# Altium PCB Analog_readout.PcbDoc
Units mm, origin at the board's own origin, x right, y up, seen from the top; angles counter-clockwise.
Board outline 100.46 x 91.44 mm, 2 copper layers (Top Layer, Bottom Layer); 87 components, 48 nets, 223 pads, 13 vias.
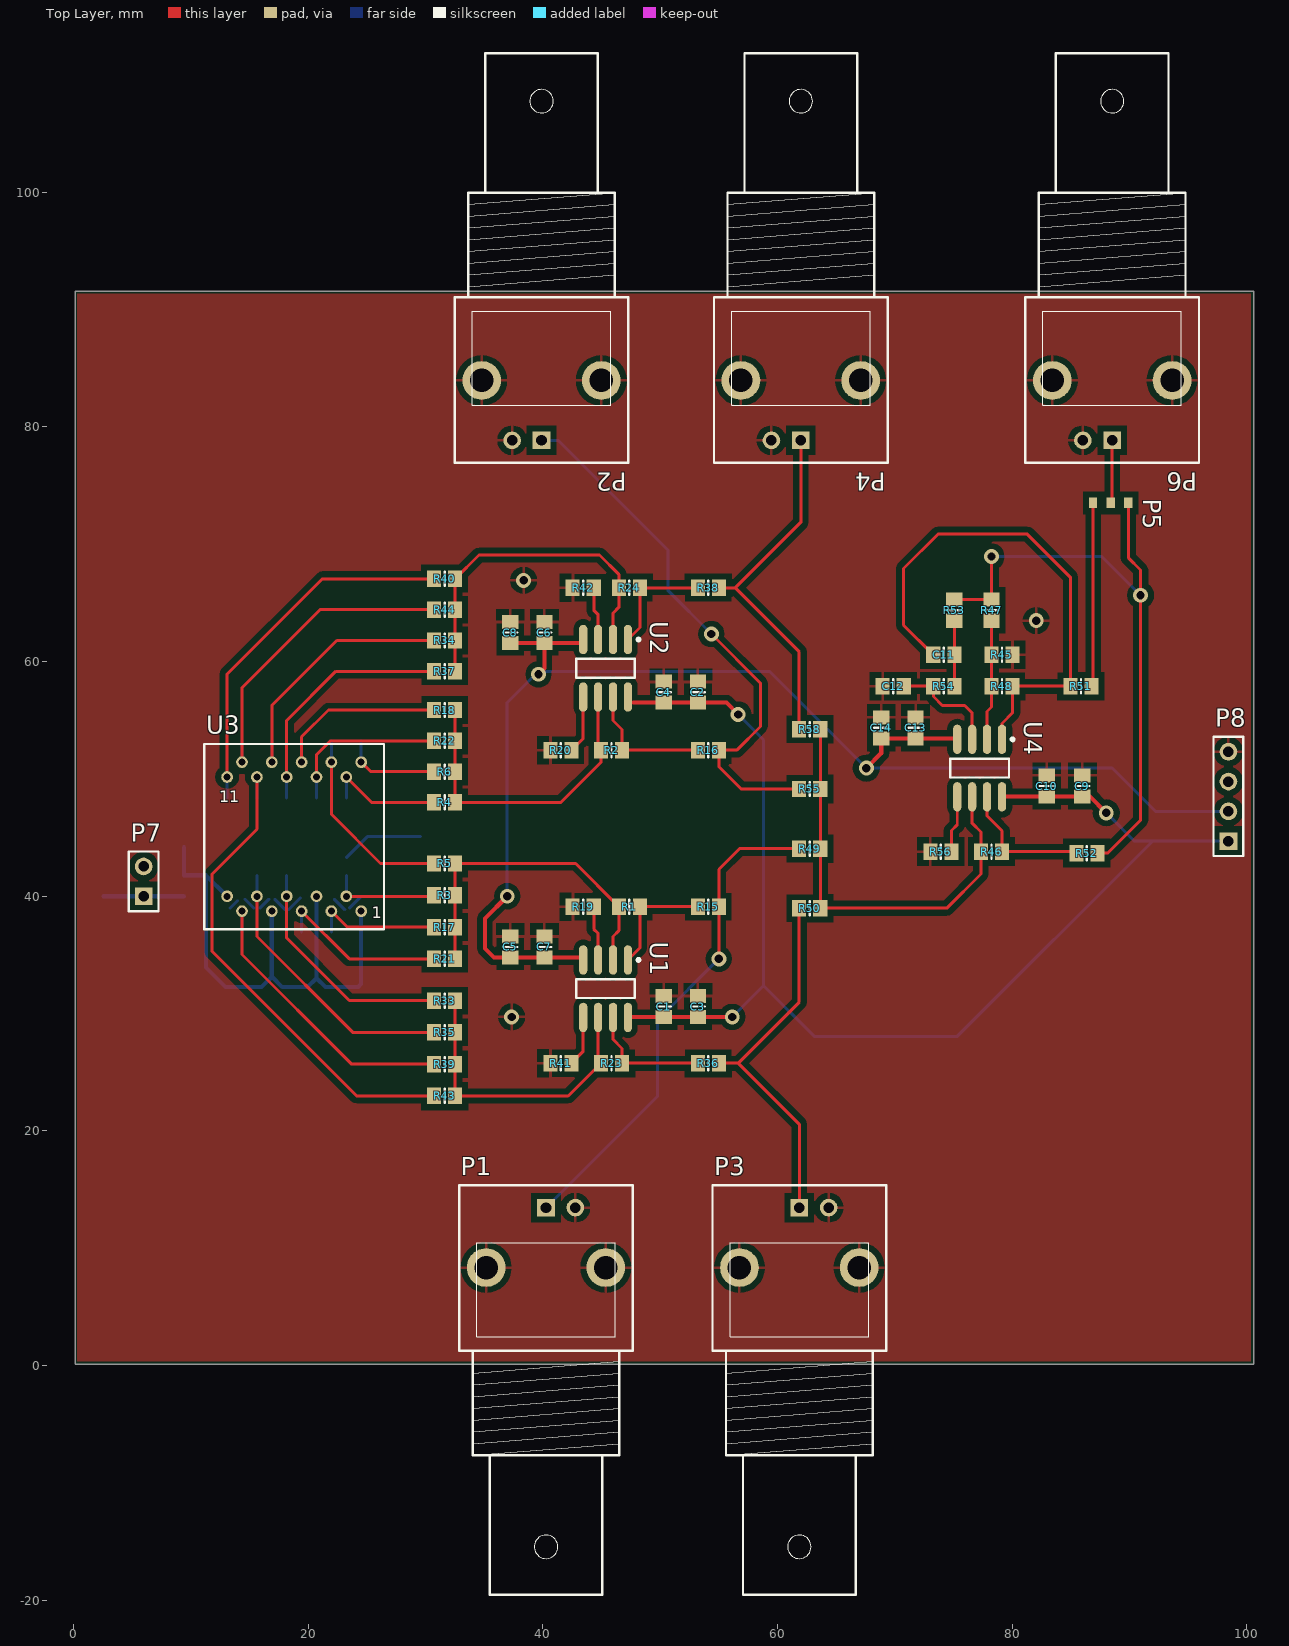
[diagram p0: Top Layer view]
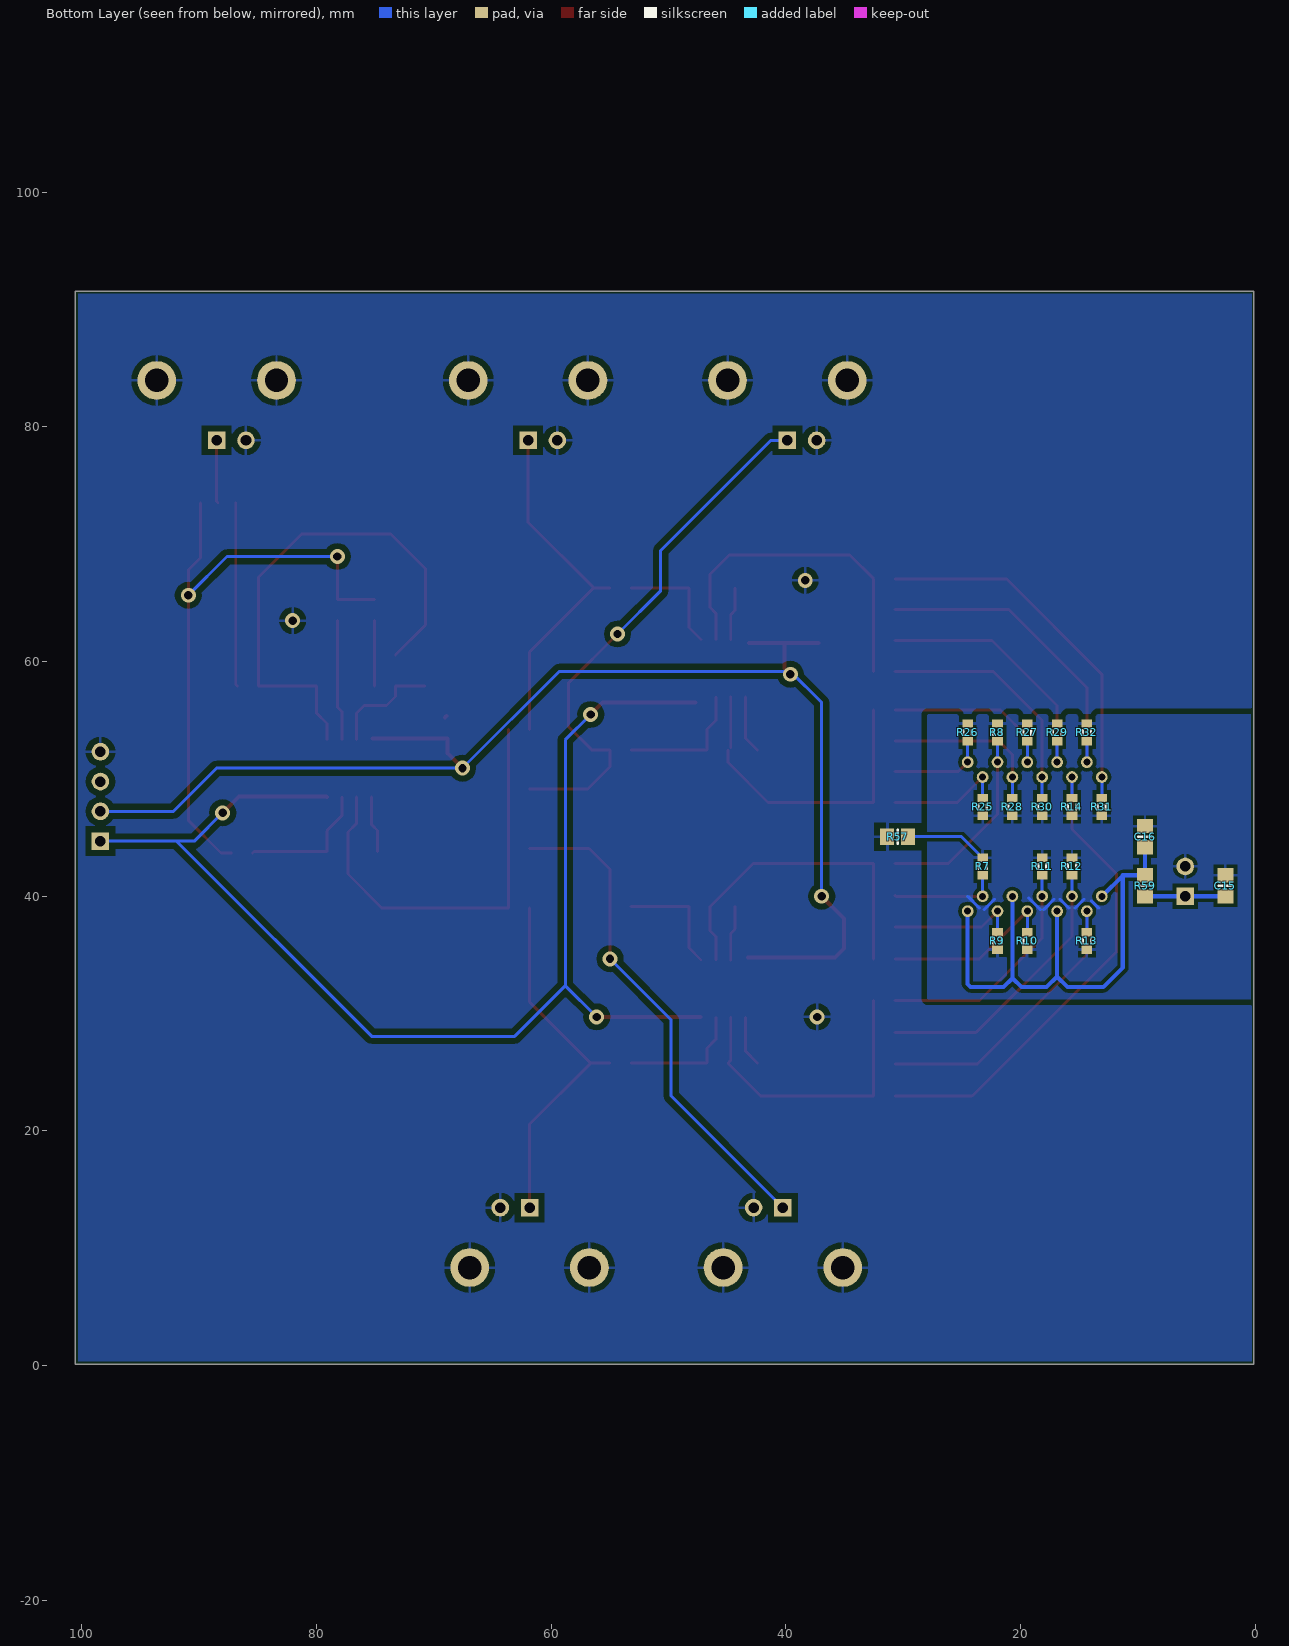
[diagram p1: Bottom Layer view, seen from below]

## Layer stack, top to bottom
Top Layer: signal copper 0.0356
Dielectric: dielectric 0.32, FR-4, Dk 4.8
Bottom Layer: signal copper 0.0356

## Board outline
0.127,0.127 0.127,91.567 100.584,91.567 100.584,0.127

## Design rules (kind name [scope] priority, off if disabled: settings)
Clearance Clearance_4 [InNamedPolygon('gnd_29') vs InNamedPolygon('gnd_bot')] p1: gap=0.5
Clearance Clearance_3 [InNamedPolygon('gnd_29')] p2: gap=0.3
Clearance Clearance_2 [InNamedPolygon('gnd_top')] p3: gap=0.5
Clearance Clearance_1 [InNamedPolygon('gnd_bot')] p4: gap=0.5
Clearance [All] p5: gap=0.254
HoleToHoleClearance [All] p1: gap=0.127 allowstackedmicrovias=TRUE
MinimumSolderMaskSliver MinimumSolderMaskSliver_1 [(InComponent('U3') OR InComponentClass('Bottom Side Components'))] p1: minsoldermaskwidth=0.05
MinimumSolderMaskSliver [All] p2: minsoldermaskwidth=0.254
PolygonConnect [All] p1: connectstyle=Relief reliefconductorwidth=0.254 reliefentries=4 polygonreliefangle="90 Angle"
RoutingVias [All] p1: holewidth=0.711 width=1.27 viastyle="Through Hole" minholewidth=0.711 minwidth=1.27 maxholewidth=0.711 maxwidth=1.27
SilkscreenOverComponentPads [All] p1: minsilkscreentomaskgap=0.254
SolderMaskExpansion SolderMaskExpansion_1 [(InComponent('U3') OR InComponentClass('Bottom Side Components'))] p1: expansion=0.05
SolderMaskExpansion [All] p2: expansion=0.102
Width Width_1 [(InNet('+29V') OR InNet('-5') OR InNet('+5') OR InNet('29_GND') OR InNet('GND')OR InNet('+29'))] p1: maxlimit=0.35 minlimit=0.254 preferedwidth=0.35 toplayer_minwidth=0.35 minimp=50.000000 maximp=50.000000 favimp=50.000000
Width [All] p2: maxlimit=0.254 minlimit=0.254 preferedwidth=0.254
25 further rules are at their usual default settings.

## Components (designator, comment, footprint, x,y, rotation, side; value= is the part's Value field where it differs from the comment)
C1 "Cap" 6-0805_N 50.292,30.607 r270 top
C2 "Cap" 6-0805_N 53.213,57.404 r270 top
C3 "Cap Pol3" 6-0805_N 53.213,30.607 r90 top
C4 "Cap Pol3" 6-0805_N 50.292,57.404 r90 top
C5 "Cap" 6-0805_N 37.211,35.687 r270 top
C6 "Cap" 6-0805_N 40.132,62.484 r270 top
C7 "Cap Pol3" 6-0805_N 40.132,35.687 r270 top
C8 "Cap Pol3" 6-0805_N 37.211,62.484 r270 top
C9 "Cap" 6-0805_N 85.979,49.403 r270 top
C10 "Cap Pol3" 6-0805_N 82.931,49.403 r90 top
C11 "Cap" 6-0805_N 74.168,60.579 r180 top
C12 "Cap" 6-0805_N 69.85,57.912 r180 top
C13 "Cap" 6-0805_N 71.755,54.356 r270 top
C14 "Cap Pol3" 6-0805_N 68.834,54.356 r270 top
C15 "Cap" 6-0805_N 2.54,40.894 r270 bottom
C16 "Cap" 6-0805_N 9.398,45.085 r270 bottom
P1 "BNC" "BNC_RA CON" 40.259,13.462 r90 top
P2 "BNC" "BNC_RA CON" 39.878,78.867 r270 top
P3 "BNC" "BNC_RA CON" 61.849,13.462 r90 top
P4 "BNC" "BNC_RA CON" 61.976,78.867 r270 top
P5 "SwitchSMD_3" SwitchSMD_0603 88.392,73.533 r0 top
P6 "BNC" "BNC_RA CON" 88.519,78.867 r270 top
P7 "Header 2" HDR1X2 5.969,40.005 r90 top
P8 "Header 4" HDR1X4 98.425,44.704 r90 top
R1 "Res3" 6-0805_N 47.371,39.116 r0 top
R2 "Res3" 6-0805_N 45.847,52.451 r0 top
R3 "Res3" 6-0805_N 31.623,40.09 r0 top
R4 "Res3" 6-0805_N 31.623,48.006 r0 top
R5 "Res3" 6-0805_N 31.623,42.799 r0 top
R6 "Res3" 6-0805_N 31.623,50.631 r0 top
R7 "Res3" J1-0603 23.241,42.545 r270 bottom
R8 "Res3" J1-0603 21.971,53.975 r270 bottom
R9 "Res3" J1-0603 21.971,36.195 r90 bottom
R10 "Res3" J1-0603 19.431,36.195 r90 bottom
R11 "Res3" J1-0603 18.161,42.545 r270 bottom
R12 "Res3" J1-0603 15.621,42.545 r270 bottom
R13 "Res3" J1-0603 14.351,36.195 r90 bottom
R14 "Res3" J1-0603 15.621,47.625 r90 bottom
R15 "Res3" 6-0805_N 54.102,39.116 r0 top
R16 "Res3" 6-0805_N 54.102,52.451 r0 top
R17 "Res3" 6-0805_N 31.623,37.38 r0 top
R18 "Res3" 6-0805_N 31.623,55.88 r0 top
R19 "Res3" 6-0805_N 43.434,39.116 r0 top
R20 "Res3" 6-0805_N 41.529,52.451 r0 top
R21 "Res3" 6-0805_N 31.623,34.671 r0 top
R22 "Res3" 6-0805_N 31.623,53.255 r0 top
R23 "Res3" 6-0805_N 45.847,25.781 r0 top
R24 "Res3" 6-0805_N 47.371,66.294 r0 top
R25 "Res3" J1-0603 23.241,47.625 r90 bottom
R26 "Res3" J1-0603 24.511,53.975 r270 bottom
R27 "Res3" J1-0603 19.431,53.975 r270 bottom
R28 "Res3" J1-0603 20.701,47.625 r90 bottom
R29 "Res3" J1-0603 16.891,53.975 r270 bottom
R30 "Res3" J1-0603 18.161,47.625 r90 bottom
R31 "Res3" J1-0603 13.081,47.625 r90 bottom
R32 "Res3" J1-0603 14.351,53.975 r270 bottom
R33 "Res3" 6-0805_N 31.623,31.115 r0 top
R34 "Res3" 6-0805_N 31.623,61.807 r0 top
R35 "Res3" 6-0805_N 31.623,28.406 r0 top
R36 "Res3" 6-0805_N 54.102,25.781 r0 top
R37 "Res3" 6-0805_N 31.623,59.182 r0 top
R38 "Res3" 6-0805_N 54.102,66.294 r0 top
R39 "Res3" 6-0805_N 31.623,25.696 r0 top
R40 "Res3" 6-0805_N 31.623,67.056 r0 top
R41 "Res3" 6-0805_N 41.529,25.781 r0 top
R42 "Res3" 6-0805_N 43.434,66.294 r0 top
R43 "Res3" 6-0805_N 31.623,22.987 r0 top
R44 "Res3" 6-0805_N 31.623,64.431 r0 top
R45 "Res3" 6-0805_N 79.121,60.579 r0 top
R46 "Res3" 6-0805_N 78.232,43.815 r0 top
R47 "Res3" 6-0805_N 78.232,64.389 r90 top
R48 "Res3" 6-0805_N 79.121,57.912 r180 top
R49 "Res3" 6-0805_N 62.738,44.069 r0 top
R50 "Res3" 6-0805_N 62.738,38.989 r0 top
R51 "Res3" 6-0805_N 85.852,57.912 r0 top
R52 "Res3" 6-0805_N 86.36,43.688 r0 top
R53 "Res3" 6-0805_N 75.057,64.389 r90 top
R54 "Res3" 6-0805_N 74.168,57.912 r0 top
R55 "Res3" 6-0805_N 62.738,49.149 r0 top
R56 "Res3" 6-0805_N 73.914,43.815 r0 top
R57 "Res3" 6-0805_N 30.48,45.085 r180 bottom
R58 "Res3" 6-0805_N 62.738,54.229 r0 top
R59 "Res3" 6-0805_N 9.398,40.894 r270 bottom
U1 "AD8002AR" SO-8_M 45.339,32.131 r270 top
U2 "AD8002AR" SO-8_M 45.339,59.436 r270 top
U3 "SPMArray4_Sensl" Sensl_PGA20P_v2 24.511,38.735 r0 top
U4 "AD8002AR" SO-8_M 77.216,50.927 r270 top

## Footprints (in the part's own frame and the unit in brackets; to place one, negate y for a bottom-side part, rotate by r counter-clockwise, add the part's x,y. Pads: shape width x height; smd on the part's side, far side on the other; paste and mask are expansions set on the pad)
6-0805_N [mm] "Chip Resistor, Body 2.0x1.2mm, IPC Medium Density"
  rect 1.2x1.4 smd: 1(-0.9,0) 2(0.9,0)
  silkscreen extent 0,-0.6 0,0.6, body extent -1.07,-0.7 1.07,0.7, height 0.7
"BNC_RA CON" [mm] "Connector; BNC Elbow"
  rect 1.5x1.5 hole 0.9: 1(0,0)
  round 3.3 hole 2: 2(-5.1,-5.1) 2(-5.1,5.1)
  round 1.5 hole 0.9: 2(0,-2.5)
  silkscreen extent -33,-7.4 1.9,7.4
HDR1X2 [mm] "Connector; Header; 2 Position"
  rect 1.5x1.5 hole 0.9: 1(0,0)
  round 1.5 hole 0.9: 2(2.54,0)
  silkscreen extent -1.27,-1.27 3.81,1.27
HDR1X4 [mm] "Connector; Header; 4 Position"
  rect 1.5x1.5 hole 0.9: 1(0,0)
  round 1.5 hole 0.9: 2(2.54,0) 3(5.08,0) 4(7.62,0)
  silkscreen extent -1.27,-1.27 8.89,1.27
J1-0603 [mm] "Chip Resistor, Body 1.6x0.8mm, IPC High Density"
  rect 0.7x0.9 smd: 1(-0.75,0) 2(0.75,0)
  silkscreen extent -0.2,-0.35 0.2,0.35, body extent -0.85,-0.48 0.85,0.48, height 0.9
Sensl_PGA20P_v2 [mm]
  round 1 hole 0.6: 1(0,0) 2(-1.27,1.27) 3(-2.54,0) 4(-3.81,1.27) 5(-5.08,0) 6(-6.35,1.27) 7(-7.62,0) 8(-8.89,1.27) 9(-10.16,0) 10(-11.43,1.27) 11(-11.43,11.43) 12(-10.16,12.7) 13(-8.89,11.43) 14(-7.62,12.7) 15(-6.35,11.43) 16(-5.08,12.7) 17(-3.81,11.43) 18(-2.54,12.7) 19(-1.27,11.43) 20(0,12.7)
  silkscreen extent -13.37,-1.55 1.94,14.25
SO-8_M [mm] "SOIC, 8-Leads, Body 4.9x3.9mm, Pitch 1.27mm, IPC Low Density"
  oval 2.5x0.7 smd: 1(-2.45,1.905) 2(-2.45,0.635) 3(-2.45,-0.635) 4(-2.45,-1.905) 5(2.45,-1.905) 6(2.45,-0.635) 7(2.45,0.635) 8(2.45,1.905)
  silkscreen extent -2.57,-2.5 0.8,2.93, body extent -2,-2.5 2,2.5, height 1.75
SwitchSMD_0603 [mm] "3 pins 0603"
  rect 0.7x0.9 smd: 1(-1.5,0) 2(1.5,0) 3(0,0)
  body extent -1.6,-0.48 1.6,0.48, height 0.9

## Part data
C1 C2 C5 C6 C9 C11 C12 C13 C15 C16: "Capacitor"
C3 C4 C7 C8 C10 C14: "Polarized Capacitor (Surface Mount)"
P1 P2 P3 P4 P6: "BNC Elbow Connector"
P7: "Header, 2-Pin"
P8: "Header, 4-Pin"
R1 R2 R3 R4 R5 R6 R7 R8 R9 R10 R11 R12 R13 R14 R15 R16 R17 R18 R19 R20 R21 R22 R23 R24 R25 R26 R27 R28 R29 R30 R31 R32 R33 R34 R35 R36 R37 R38 R39 R40 R41 R42 R43 R44 R45 R46 R47 R48 R49 R50 R51 R52 R53 R54 R55 R56 R57 R58 R59: "Resistor"
U1 U2 U4: "Dual 600MHz, 50mW Current Feedback Amplifier"

## Via types
v1: diameter 1.27, hole 0.711, Top Layer to Bottom Layer, 13 vias

## Nets (pads, with @x,y where several pads share a name; then routed paths per layer and width w, separated by ;. In a path a pad name is that pad's centre, name@x,y a point inside that pad or via, vN(x,y) a via of type N, cw(c..) or ccw(c..) an arc to the next point about the centre after c; other vN are vias at no path point)
29_GND: C15.1 C16.1 P7.2 R7.1 R8.1 R9.1 R10.1 R11.1 R12.1 R13.1 R14.1 R25.1 R26.1 R27.1 R28.1 R29.1 R30.1 R31.1 R32.1 R57.2 | length 15.5
  Bottom Layer w0.254: 13.335,38.989 13.97,39.624 ; 14.605,39.751 15.367,38.989 ; 15.875,38.989 16.637,39.751 ; 17.145,39.751 18.034,38.862 ; 18.312,38.862 19.328,39.878 ; 22.225,39.751 23.114,38.862 ; R7.1 25.031,45.085 R57.2 ; 23.495,38.989 24.511,40.005
+5: C1.2 C2.2 C3.1 C4.1 C9.2 C10.1 P8.1 U1.8 U2.8 U4.8 | length 108.9
  Top Layer w0.35: U1.8@47.27,29.707 C1.2 C3.1 53.224,29.718 v1(56.134,29.718) ; 47.726,56.504 C4.1 C2.2 55.637,56.504 v1(56.642,55.499) ; U4.8 79.147,48.503 C9.2 86.625,48.503 v1(88.011,47.117)
  Bottom Layer w0.254: v1@56.007,29.591 v1(56.134,29.718) 58.801,32.385 ; v1(56.642,55.499) 58.801,53.34 58.801,32.385 ; v1(88.011,47.117) 90.424,44.704 91.948,44.704 ; P8.1 91.948,44.704 ; 58.801,32.385 63.119,28.067 75.311,28.067 91.948,44.704
+29: C15.2 P7.1 R59.2 | length 6.8
  Bottom Layer w0.35: C15.2@2.551,40.005 P7.1 R59.2@9.387,40.005
+29V: C16.2 R59.1 U3.1 U3.4 U3.7 U3.10 | length 48.9
  Bottom Layer w0.35: C16.2 R59.1 11.292,41.794 ; U3.10 11.292,41.794 ; U3.7 16.891,33.147 ; U3.4 20.701,33.02 ; U3.1 24.511,32.512 24.257,32.258 21.463,32.258 20.701,33.02 ; 11.292,41.794 11.292,33.92 12.954,32.258 16.002,32.258 16.891,33.147 ; 16.891,33.147 17.78,32.258 19.939,32.258 20.701,33.02
-5: C5.2 C6.2 C7.2 C8.2 C13.2 C14.2 P8.2 U1.4 U2.4 U4.4 | length 116
  Top Layer w0.35: v1(36.957,40.005) 35.052,38.1 35.052,35.56 35.825,34.787 C5.2 C7.2 U1.4@43.228,34.787 ; C8.2 C6.2 ; v1(39.624,58.928) 40.132,59.436 C6.2 ; U2.4@43.132,61.584 C6.2 ; v1(67.564,50.927) 68.834,52.197 C14.2 C13.2 U4.4@75.232,53.456
  Bottom Layer w0.254: v1(36.957,40.005) 36.957,56.515 39.624,59.182 59.309,59.182 v1(67.564,50.927) 88.519,50.927 92.202,47.244 P8.2
GND: C1.1 C2.1 C3.2 C4.2 C5.1 C6.1 C7.1 C8.1 C9.1 C10.2 C12.2 C13.1 C14.1 P1.2 P2.2 P3.2 P4.2 P6.2 P8.4 R19.1 R20.1 R41.1 R42.1 R45.2 R56.1 R57.1 | length 0.2
  Top Layer w0.35: C14.1@68.95,55.372 C14.1@69.066,55.256
  other v1: 37.338,29.718 82.042,63.5 38.354,66.929
NetC11_1: C11.1 R53.1 R54.2 | length 5.6
  Top Layer w0.254: R53.1 75.057,57.923 R54.2
NetC11_2: C11.2 R48.1 R51.1 U4.1 | length 44.5
  Top Layer w0.254: C11.2 70.739,63.108 70.739,67.945 73.66,70.866 81.28,70.866 84.952,67.194 R51.1 R48.1 80.021,55.637 79.121,54.737 U4.1
NetC12_1: C12.1 R54.1 U4.3 | length 9.5
  Top Layer w0.254: C12.1 R54.1 73.279,57.901 73.279,57.023 74.041,56.261 75.946,56.261 76.581,55.626 U4.3
NetP1_1: P1.1 R15.2 R49.1 | length 42.5
  Top Layer w0.254: v1(54.991,34.671) 55.002,34.682 R15.2 55.002,42.302 56.769,44.069 R49.1
  Bottom Layer w0.254: P1.1 49.784,22.987 49.784,29.464 v1(54.991,34.671)
NetP2_1: P2.1 R16.2 R55.1 | length 46.4
  Top Layer w0.254: v1(54.356,62.357) 58.547,58.166 58.547,54.483 56.515,52.451 R16.2 55.002,51.043 56.896,49.149 R55.1
  Bottom Layer w0.254: P2.1 41.275,78.867 50.673,69.469 50.673,66.04 v1(54.356,62.357)
NetP3_1: P3.1 R36.2 R50.1 | length 31.5
  Top Layer w0.254: R36.2 56.642,25.781 ; R50.1 61.838,30.977 56.642,25.781 ; P3.1 61.849,20.574 56.642,25.781
NetP4_1: P4.1 R38.2 R58.1 | length 30.6
  Top Layer w0.254: R38.2 56.388,66.294 ; R58.1 61.838,60.844 56.388,66.294 ; P4.1 61.976,71.882 56.388,66.294
NetP5_1: P5.1 R51.2 | length 15.7
  Top Layer w0.254: R51.2 86.892,58.052 P5.1
NetP5_2: P5.2 R47.2 R52.2 R53.2 | length 53.2
  Top Layer w0.254: R53.2 R47.2 v1(78.232,68.961) ; R52.2 88.138,43.688 90.932,46.482 v1(90.932,65.659) 90.932,67.818 89.892,68.858 P5.2
  Bottom Layer w0.254: v1(78.232,68.961) 87.63,68.961 v1(90.932,65.659)
NetP5_3: P5.3 P6.1 | length 5.4
  Top Layer w0.254: P5.3 88.519,73.66 P6.1
NetR1_1: R1.1 R3.2 R5.2 R17.2 R21.2 U1.2 | length 28.3
  Top Layer w0.254: R21.2 R17.2 R3.2 R5.2 42.788,42.799 R1.1 46.471,37.073 45.974,36.576 U1.2
NetR1_2: R1.2 R15.1 U1.1 | length 9.9
  Top Layer w0.254: U1.1 48.271,35.608 R1.2 R15.1
NetR2_1: R2.1 R4.2 R6.2 R18.2 R22.2 U2.6 | length 27
  Top Layer w0.254: R18.2 R22.2 R6.2 R4.2 41.529,48.006 44.947,51.424 R2.1 ; R2.1@44.704,52.694 U2.6
NetR2_2: R2.2 R16.1 U2.7 | length 11.3
  Top Layer w0.254: U2.7 45.974,54.991 46.747,54.218 R2.2 R16.1
NetR3_1: R3.1 R7.2 U3.2 | length 9.3
  Top Layer w0.254: U3.2 30.638,40.005 R3.1
  Bottom Layer w0.254: U3.2 R7.2
NetR4_1: R4.1 R25.2 U3.19 | length 10.2
  Top Layer w0.254: U3.19 25.4,48.006 R4.1
  Bottom Layer w0.254: R25.2 U3.19
NetR5_1: R5.1 R8.2 U3.18 | length 16.7
  Top Layer w0.254: U3.18 21.971,50.165 21.971,46.99 26.162,42.799 R5.1
  Bottom Layer w0.254: U3.18 R8.2
NetR6_1: R6.1 R26.2 U3.20 | length 8.3
  Top Layer w0.254: U3.20 25.315,50.631 R6.1
  Bottom Layer w0.254: U3.20 R26.2
NetR9_2: R9.2 R17.1 U3.3 | length 11.1
  Top Layer w0.254: U3.3 23.326,37.38 R17.1
  Bottom Layer w0.254: R9.2 U3.3
NetR10_2: R10.2 R21.1 U3.5 | length 14.8
  Top Layer w0.254: U3.5 23.495,34.671 R21.1
  Bottom Layer w0.254: R10.2 U3.5
NetR11_2: R11.2 R33.1 U3.6 | length 20.1
  Top Layer w0.254: U3.6 18.161,36.449 23.495,31.115 R33.1
  Bottom Layer w0.254: U3.6 R11.2
NetR12_2: R12.2 R35.1 U3.8 | length 23.7
  Top Layer w0.254: U3.8 15.621,36.576 23.791,28.406 R35.1
  Bottom Layer w0.254: U3.8 R12.2
NetR13_2: R13.2 R39.1 U3.9 | length 25.7
  Top Layer w0.254: U3.9 14.351,35.052 23.707,25.696 R39.1
  Bottom Layer w0.254: R13.2 U3.9
NetR14_2: R14.2 R43.1 U3.13 | length 42.2
  Top Layer w0.254: U3.13 15.621,45.72 11.811,41.91 11.811,35.306 24.13,22.987 R43.1
  Bottom Layer w0.254: R14.2 U3.13
NetR18_1: R18.1 R27.2 U3.16 | length 16.2
  Top Layer w0.254: U3.16 19.431,53.594 21.717,55.88 R18.1
  Bottom Layer w0.254: U3.16 R27.2
NetR19_2: R19.2 U1.3 | length 4.7
  Top Layer w0.254: R19.2 44.334,37.2 44.704,36.83 U1.3
NetR20_2: R20.2 U2.5 | length 5
  Top Layer w0.254: R20.2 43.434,53.456 U2.5
NetR22_1: R22.1 R28.2 U3.17 | length 14.2
  Top Layer w0.254: U3.17 20.701,52.07 21.886,53.255 R22.1
  Bottom Layer w0.254: R28.2 U3.17
NetR23_1: R23.1 R33.2 R35.2 R39.2 R43.2 U1.6 | length 25.7
  Top Layer w0.254: R33.2 R35.2 R39.2 R43.2 42.153,22.987 R23.1 44.704,26.024 U1.6
NetR23_2: R23.2 R36.1 U1.7 | length 10.7
  Top Layer w0.254: U1.7 45.974,27.813 46.747,27.04 R23.2 R36.1
NetR24_1: R24.1 R34.2 R37.2 R40.2 R44.2 U2.2 | length 29.1
  Top Layer w0.254: R37.2 R34.2 R44.2 R40.2 34.555,69.088 44.831,69.088 46.471,67.448 R24.1 46.471,64.632 45.974,64.135 U2.2
NetR24_2: R24.2 R38.1 U2.1 | length 9.8
  Top Layer w0.254: U2.1 48.271,62.913 R24.2 R38.1
NetR29_2: R29.2 R34.1 U3.14 | length 22.7
  Top Layer w0.254: U3.14 16.891,56.261 22.437,61.807 R34.1
  Bottom Layer w0.254: U3.14 R29.2
NetR30_2: R30.2 R37.1 U3.15 | length 20.9
  Top Layer w0.254: U3.15 18.161,54.991 22.352,59.182 R37.1
  Bottom Layer w0.254: R30.2 U3.15
NetR31_2: R31.2 R40.1 U3.11 | length 31.6
  Top Layer w0.254: U3.11 13.081,58.928 21.209,67.056 R40.1
  Bottom Layer w0.254: R31.2 U3.11
NetR32_2: R32.2 R44.1 U3.12 | length 27.3
  Top Layer w0.254: U3.12 14.351,57.785 20.997,64.431 R44.1
  Bottom Layer w0.254: U3.12 R32.2
NetR41_2: R41.2 U1.5 | length 4.3
  Top Layer w0.254: R41.2 43.434,26.786 U1.5
NetR42_2: R42.2 U2.3 | length 4.6
  Top Layer w0.254: R42.2 44.334,64.378 44.704,64.008 U2.3
NetR45_1: R45.1 R47.1 R48.2 U4.2 | length 10.3
  Top Layer w0.254: U4.2 77.851,55.753 78.232,56.134 R47.1
NetR46_1: R46.1 R49.2 R50.2 R55.2 R58.2 U4.6 | length 37
  Top Layer w0.254: R58.2 R55.2 R49.2 R50.2 74.422,38.989 77.332,41.899 R46.1 77.332,45.477 76.581,46.228 U4.6
NetR46_2: R46.2 R52.1 U4.7 | length 11.6
  Top Layer w0.254: U4.7 77.851,46.863 79.132,45.582 R46.2 85.333,43.815 R52.1
NetR56_2: R56.2 U4.5 | length 4.9
  Top Layer w0.254: R56.2 74.814,45.604 75.311,46.101 U4.5
pads on no net: P8.3

## Polygon pours and split planes (outlines as drawn)
GND on Top Layer "gnd_top" (solid, remove dead copper, pour order 13): 0.313,91.368 0.313,0.381 100.313,0.381 100.313,91.368
GND on Bottom Layer "gnd_bot" (solid, remove dead copper, pour order 14): 0.313,91.368 0.313,0.381 100.313,0.381 100.313,91.368
29_GND on Bottom Layer "gnd_29" (solid, remove dead copper, pour order 15): 0.381,55.499 0.381,31.242 27.94,31.242 27.94,55.499

## Silkscreen, mask and mechanical layers (free items; w line width, h text height)
Drill Drawing:
  the board outline again, w0.254

## Text inside footprints (layer, text, board x,y; h text height)
U3: Top Overlay "1" at 25.406,38.122 h1; Top Overlay "11" at 12.406,48.022 h1